# EAGLE board AcceLog_v00 (EAGLE 7.3.0)
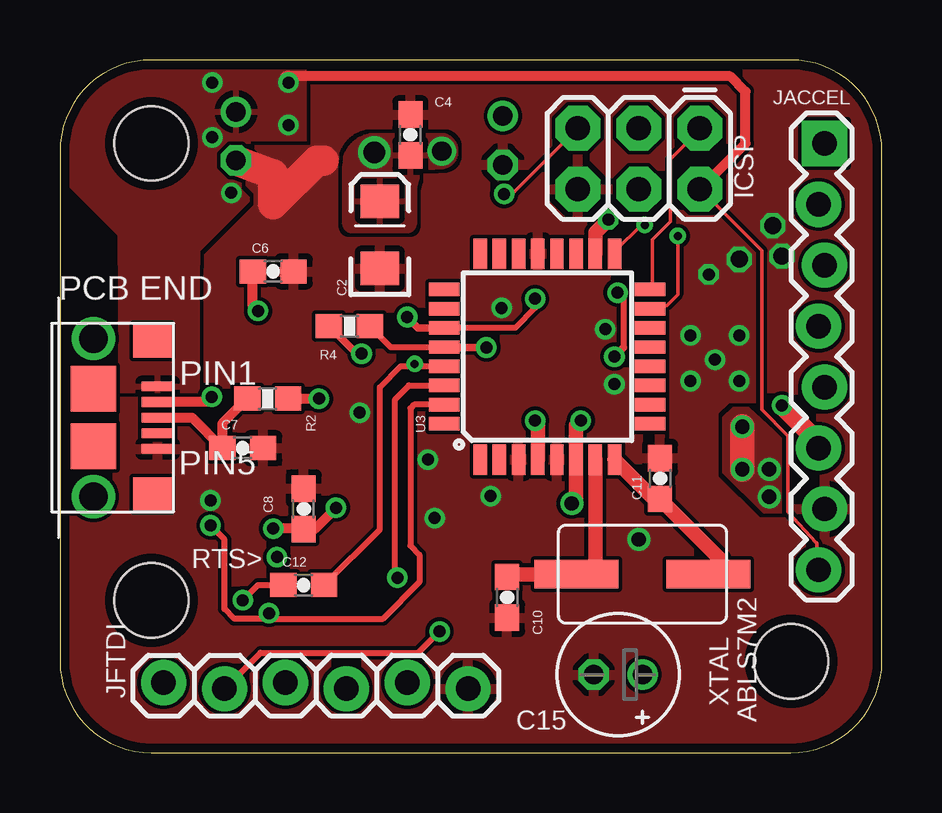
[diagram p0: board, top side]
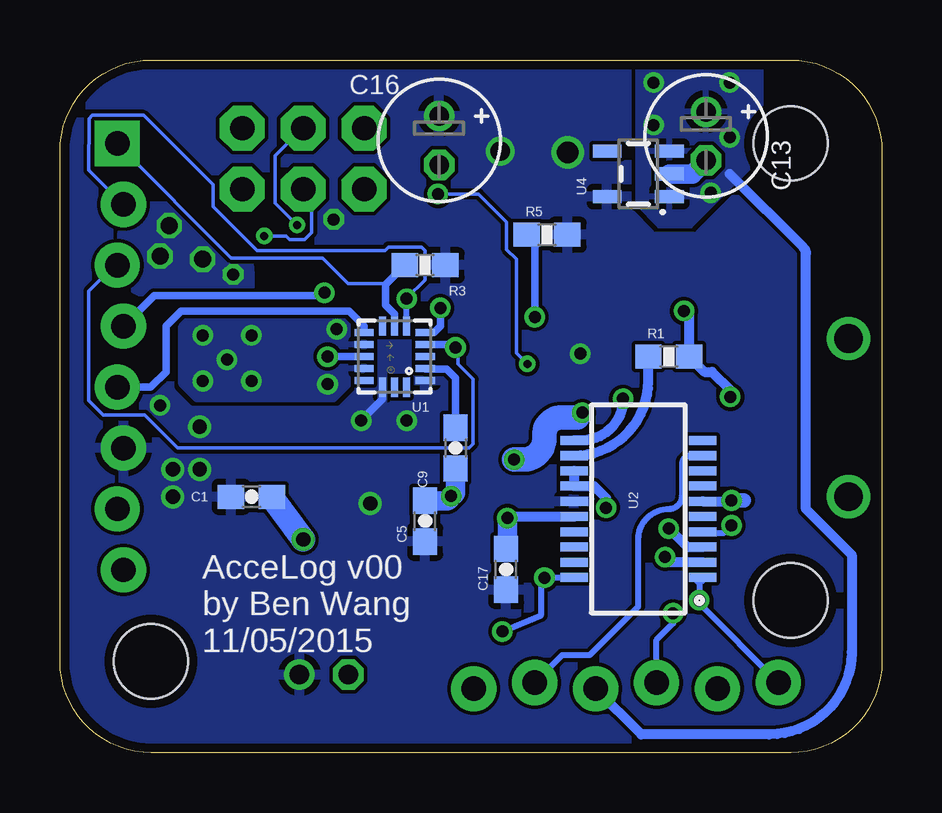
[diagram p1: board, bottom side, seen from below]

Size 34.27 x 28.88 mm. Coordinates in mm from the lower left corner, seen from the top.
Outline: 0,25.07 0,3.81 arc90 3.81,0 30.46,0 arc90 34.27,3.81 34.27,25.07 arc90 30.46,28.88 3.81,28.88 arc90 0,25.07
Copper layers (1*16): Top 0.0356mm / dielectric 1.5011mm / Bottom 0.0356mm
Design rules "LaenPCBOrder": minimum track width 6mil, minimum drill 13mil, track to track 6mil, track to pad 6mil, pad to pad 6mil, via to via 6mil, smd to smd 6mil, copper to edge 15mil, drill to drill 6mil, minimum pad ring 7mil, minimum via ring 7mil, stop-mask expansion 3mil, vias tented up to drill 0mil, thermal gap 10mil
Holes 3.1 mm at 30.48,3.81 3.81,25.4 3.81,6.35

## Footprints (pad centres in the part's own frame; a part is rotated, then mirrored left to right if it is on the bottom)
0603-CAP = smd 1.1 x 1: 1 -0.85,0; 2 0.85,0
EIA3216 = smd 1.4 x 1.6: A 1.4,0; C -1.4,0
E2-5 = drill 0.813 pad 1.27: + -1.016,0 | drill 0.813 pad 1.27 octagon: - 1.016,0
2X3 = drill 1.016 pad 1.88 octagon: 1 0,0; 2 0,2.54; 3 2.54,0; 4 2.54,2.54; 5 5.08,0; 6 5.08,2.54
1X08_LOCK = drill 1.016 pad 1.88 square: 1 0,0.127 | drill 1.016 pad 1.88: 2 2.54,-0.127; 3 5.08,0.127; 4 7.62,-0.127; 5 10.16,0.127; 6 12.7,-0.127; 7 15.24,0.127; 8 17.78,-0.127
1X06_LOCK = drill 1.016 pad 1.88: 1 0,0; 2 2.54,-0.254; 3 5.08,0; 4 7.62,-0.254; 5 10.16,0; 6 12.7,-0.254
10118193 = smd 0.4 x 1.35: D+ 0,2.675; D- -0.65,2.675; GND 1.3,2.675; ID 0.65,2.675; VBUS -1.3,2.675 | smd 1.4 x 1.6: P$6 -3.2,2.45; P$7 3.2,2.45 | smd 1.9 x 1.9: P$8 1.2,0; P$9 -1.2,0 | drill 1.2 pad 1.6: P$11 3.3,0; P$12 -3.3,0
0603-RES = smd 1.1 x 1: 1 -0.85,0; 2 0.85,0
QFN-16_0.5MM = smd 0.8 x 0.3: 1 -1.275,1; 2 -1.275,0.5; 3 -1.275,0; 4 -1.275,-0.5; 5 -1.275,-1; 9 1.275,-1; 10 1.275,-0.5; 11 1.275,0; 12 1.275,0.5; 13 1.275,1 | smd 0.3 x 0.8: 6 -0.5,-1.275; 7 0,-1.275; 8 0.5,-1.275; 14 0.5,1.275; 15 0,1.275; 16 -0.5,1.275
SSOP20_L = smd 0.381 x 1.143: 1 -2.857,-2.68; 2 -2.223,-2.68; 3 -1.587,-2.68; 4 -0.953,-2.68; 5 -0.318,-2.68; 6 0.318,-2.68; 7 0.953,-2.68; 8 1.587,-2.68; 9 2.223,-2.68; 10 2.857,-2.68; 11 2.857,2.68; 12 2.223,2.68; 13 1.587,2.68; 14 0.953,2.68; 15 0.318,2.68; 16 -0.318,2.68; 17 -0.953,2.68; 18 -1.587,2.68; 19 -2.223,2.68; 20 -2.857,2.68
TQFP32-08 = smd 1.27 x 0.559: 1 -4.293,2.8; 2 -4.293,2; 3 -4.293,1.2; 4 -4.293,0.4; 5 -4.293,-0.4; 6 -4.293,-1.2; 7 -4.293,-2; 8 -4.293,-2.8; 17 4.293,-2.8; 18 4.293,-2; 19 4.293,-1.2; 20 4.293,-0.4; 21 4.293,0.4; 22 4.293,1.2; 23 4.293,2; 24 4.293,2.8 | smd 0.559 x 1.27: 9 -2.8,-4.293; 10 -2,-4.293; 11 -1.2,-4.293; 12 -0.4,-4.293; 13 0.4,-4.293; 14 1.2,-4.293; 15 2,-4.293; 16 2.8,-4.293; 25 2.8,4.293; 26 2,4.293; 27 1.2,4.293; 28 0.4,4.293; 29 -0.4,4.293; 30 -1.2,4.293; 31 -2,4.293; 32 -2.8,4.293
SOT23-5 = smd 0.55 x 1.2: 1 -0.95,-1.3; 2 0,-1.3; 3 0.95,-1.3; 4 0.95,1.3; 5 -0.95,1.3
ABLS7M2 = smd 3.5 x 1.2: P$1 -2.75,0; P$2 2.75,0

## Placement (x,y rotation side)
C1  0.1uF  [0603-CAP]  26.29,10.67 0 bottom
C2  2.2uF  [EIA3216]  13.34,21.59 90 top
C4  0.1uF  [0603-CAP]  14.61,25.76 90 top
C5  4.7uF  [0603-CAP]  19.05,9.65 90 bottom
C6  47pF  [0603-CAP]  8.89,20.07 0 top
C7  47pF  [0603-CAP]  7.62,12.7 0 top
C8  100nF  [0603-CAP]  10.16,10.16 90 top
C9  0.1uF  [0603-CAP]  17.78,12.7 270 bottom
C10  18pF  [0603-CAP]  18.64,6.48 270 top
C11  18pF  [0603-CAP]  25.02,11.43 90 top
C12  0.1uF  [0603-CAP]  10.16,6.99 0 top
C13  [E2-5]  7.34,25.7 270 bottom
C15  [E2-5]  23.27,3.25 180 top
C16  [E2-5]  18.47,25.53 270 bottom
C17  0.1uF  [0603-CAP]  15.67,7.65 90 bottom
ICSP  [2X3]  26.67,26.04 180 top
JACCEL  [1X08_LOCK]  31.75,25.4 270 top
JFTDI  [1X06_LOCK]  4.32,2.92 0 top
JUSB  10118193  [10118193]  1.4,13.97 270 top
R1  27Ω  [0603-RES]  8.89,16.51 0 bottom
R2  27Ω  [0603-RES]  8.66,14.76 180 top
R3  27Ω  [0603-RES]  19.05,20.32 0 bottom
R4  10KΩ  [0603-RES]  12.06,17.78 180 top
R5  10KΩ  [0603-RES]  13.97,21.59 0 bottom
U1  MMA8452Q  [QFN-16_0.5MM]  20.32,16.51 180 bottom
U2  FTS31XS-U  [SSOP20_L]  10.16,10.16 90 bottom
U3  ATMEGA328P_TQFP  [TQFP32-08]  20.32,16.51 90 top
U4  3.3V/150mA  [SOT23-5]  10.16,24.13 90 bottom
XTAL  ABLS7M2  [ABLS7M2]  24.28,7.44 180 top

## Library data of the parts
C1 C4-C12 C17 R1-R5 = SparkFun-Passives
C2 = SparkFun-Capacitors
C13 C15 C16 = rcl
ICSP = SparkFun-Connectors; PROD_ID: CONN-09701
JACCEL JFTDI = SparkFun-Connectors
JUSB = MicroUSB; MPN: 10118193; OC_DIGIKEY: 609-4616-1-ND; WEBSITE: http://www.digikey.com/product-detail/en/10118193-0001LF/609-4616-1-ND/2785380
U1 = SparkFun-Sensors; PROD_ID: IC-10769
U2 = SparkFun-DigitalIC; PROD_ID: IC-11524
U3 = SparkFun-DigitalIC; PROD_ID: IC-09069
U4 = SparkFun-PowerIC; PROD_ID: VREG-00822
XTAL = AcceLogLib; DIGIKEY: 535-12830-1-ND; WEBSITE: http://www.digikey.com/product-detail/en/ABLS7M2-16.000MHZ-D-2Y-T/535-12830-1-ND/5135076

## Nets
+3V3: C1.1 C2.A C4.1 C5.1 C15.+ C16.+ C17.1 JACCEL.6 R3.2 R4.2 R5.2 U1.1 U1.14 U2.15 U3.4 U3.6 U3.18 U4.5
+5V: C13.+ ICSP.2 JACCEL.8 JFTDI.4 JUSB.VBUS U4.1 U4.3
CTS: JFTDI.5 U2.9
D+: C7.1 JUSB.D+ R2.2
D-: C6.1 JUSB.D- R1.2
DTR: C12.1 JFTDI.1 U2.1
FTDI3V3: C8.1 U2.3 U2.13 U2.14
GND: C1.2 C2.C C4.2 C5.2 C6.2 C7.2 C8.2 C9.2 C10.2 C11.2 C13.- C15.- C16.- C17.2 ICSP.6 JACCEL.7 JFTDI.6 JUSB.GND U1.5 U1.10 U1.12 U2.6 U2.16 U3.3 U3.5 U3.21 U4.2
INT1: JACCEL.4 U1.11
INT2: JACCEL.5 U1.9
MISO: ICSP.1 U3.16
MOSI: ICSP.4 U3.15
N$10: C10.1 U3.7 XTAL.P$2
N$11: C9.1 U1.2
N$12: C11.1 U3.8 XTAL.P$1
RESET: C12.2 ICSP.5 U3.29
RTS: U2.2
RXD: JFTDI.3 U2.4 U3.31
SA0: JACCEL.1 R3.1 U1.7
SCK: ICSP.3 U3.17
SCL: JACCEL.3 R4.1 U1.4 U3.28
SDA: JACCEL.2 R5.1 U1.6 U3.27
TXD: JFTDI.2 U2.20 U3.30
USBDM: R1.1 U2.12
USBDP: R2.1 U2.11

## Tracks (layer width: path | path; a pad name or v marks a point on that pad's centre or on a via)
+3V3  (via drill 0.5, 0.6, 0.8, 0.9)
  Top 0.305: R4.2 12.36,16.64 v12.57,16.64
  Top 0.61: U3.4 19.92,13.61 v19.81,13.84 | U3.6 21.52,13.65 v21.72,13.84 | v22.86,22.23 22.32,21.68 U3.18 | v21.34,10.39 21.51,10.57 21.51,12.6
  Top 0.813: 31.5,12.7 31.5,13.08 v30.1,14.48
  Top 1.016: 31.5,12.7 31.75,12.7 | v28.45,13.59 v28.45,11.81
  Bottom 0.305: U1.14 20.82,14.74 v21.72,13.84
  other vias: 13.11,25.02 15.91,25.08 29.57,10.67 29.57,11.81
  pour Bottom (rank 5): 0,30.48 36.83,30.48 36.83,-5.08 0,-5.08
  pour Top: 27.69,13.97 28.07,14.35 28.7,14.35 30.23,12.95 30.23,10.16 30.1,10.03 29.34,10.03 27.69,11.68
  pour Top: 11.89,23.11 11.89,24.46 arc-90 13.16,25.73 15.85,25.73 arc-90 16.48,25.1 16.48,25.07 arc-90 15.85,24.43 15.7,24.43 arc90 14.76,23.5 14.76,22.15 14.76,22.09 arc-90 14.44,21.77 13.06,21.77 12.2,21.77 arc-90 11.89,22.09
+5V  (via drill 0.5)
  Top 0.152: JACCEL.8 31.55,7.67 31.55,8.74 31.52,8.74 30.35,10.03 30.35,13.21 29.26,14.3 29.26,20.93 26.82,23.37 ICSP.2
  Top 0.406: ICSP.2 28.57,25.4 28.57,27.56 27.94,28.19 9.4,28.19
  Bottom 0.406: JFTDI.4 10.03,0.76 4.7,0.76 arc-90 1.27,4.19 1.27,8.26 3.17,10.16 3.17,20.82 arc-45 3.27,21.05 6.35,24.13
  other vias: 6.35,25.65 9.53,26.16 9.53,27.94 6.35,27.94 7.14,23.34
  pour Bottom (rank 3): 5.08,25.4 4.57,25.4 8,21.97 9.27,21.97 10.16,22.86 10.16,31.75 5.08,31.75
  pour Top (rank 3): 2.54,15.11 5.71,15.11 5.71,21.16 2.54,21.16
  pour Top (rank 2): 2.54,20.32 2.54,21.92 5.08,24.46 5.08,29.21 6.35,29.21 10.16,29.21 10.16,25.4 5.71,20.95 5.71,20.68 5.71,20.32
  pour Top (rank 3): 2.54,21.59 -1.27,25.4 -1.27,26.67 1.27,29.21 5.08,29.21 6.35,27.94 6.35,24.13 3.81,21.59
CTS
  Bottom 0.254: JFTDI.5 13.34,4.06 12.19,4.06 10.16,6.1 10.16,8.89 arc90 8.89,10.16 arc-90 8.33,10.72 8.33,12.04 arc90 7.99,12.38 U2.9 | 7.66,12.38 U2.9 | 7.81,12.38 U2.9
D+
  Top 0.406: JUSB.D+ 5.5,13.97 C7.1 6.77,13.72 R2.2
D-  (via drill 0.5)
  Top 0.406: v8.26,18.41 8.04,18.63 C6.1 | v6.33,14.83 6.11,14.62 JUSB.D-
  Bottom 0.406: v8.26,18.41 8.04,18.2 R1.2 7.41,15.88 7.09,15.88 6.33,15.11 v6.33,14.83
DTR  (via drill 0.5)
  Top 0.254: v7.62,6.35 8.26,6.99 C12.1
  Bottom 0.254: 7.62,7.16 v7.62,6.35 | 7.62,6.22 JFTDI.1
  Bottom 0.406: U2.1 7.62,7.16 | v7.62,6.35 7.62,6.22
FTDI3V3  (via drill 0.5)
  Top 0.406: v11.51,10.21 10.61,9.31 C8.1 | 10.15,9.3 10.1,9.35 v8.89,9.35
  Top 0.813: 10.2,9.27 arc-90 C8.1 arc-90 10.15,9.3
  Bottom 0.406: U2.13 U2.14 12,11.11 11.51,10.62 v11.51,10.21 | v8.89,9.35 8.12,8.57 U2.3
GND  (via drill 0.5, 0.6, 0.7)
  Top 0.813: 11,24.69 11,24.77
  Top 1.27: 11,24.69 10.72,24.69 8.89,22.86 8.89,24.1 U4.2 C13.-
  Bottom 0.305: v18.41,18.54 18.41,17.78 18.68,17.51 U1.5
  Bottom 0.406: v15.62,9.78 15.56,9.84 U2.16 | U2.6 6.31,10.48 v6.27,10.52
  Bottom 0.61: 5.75,10.52 v6.27,10.52
  Bottom 0.813: C13.- 7.9,24.13 U4.2 | C17.2 15.62,8.55 v15.62,9.78 | C9.2 17.78,10.92 arc90 v17.96,10.69 arc90 18.2,10.5 C5.2
  Bottom 1.016: v24.13,8.89 C1.2 | 12.7,13.97 13.39,13.97 arc-90 14.07,13.28 14.07,13.11 arc90 14.96,12.22 v15.34,12.22
  other vias: 27.3,16.38 28.32,17.4 26.29,15.49 26.29,17.4 27.05,19.94 28.32,20.57 29.72,21.97 30.1,20.7 28.32,15.49 23.11,15.37 22.73,17.65 12.5,14.17
  pour Top (rank 5): -1.27,31.75 35.56,31.75 35.56,-2.54 -1.27,-2.54
  pour Bottom: 22.86,18.41 21.59,17.14 21.59,16 22.86,14.73 28.57,14.73 29.21,15.37 29.21,17.78 28.57,18.41
  pour Bottom: 26.67,19.05 30.48,19.05 arc90 31.75,20.32 31.75,21.59 arc90 30.48,22.86 29.21,22.86 arc90 26.29,19.94 26.29,19.43 arc90
  pour Top: 7.67,25.22 11.43,25.22 8.46,22.25 8.46,23.09 7.8,23.75 8.2,24.16 8.2,24.99
INT1  (via drill 0.5)
  Top 0.254: v23.24,19.18 23.5,18.92 23.5,16.89
  Top 0.305: 23.5,16.89 v23.11,16.51
  Bottom 0.305: U1.11 v23.11,16.51 | JACCEL.4 30.35,19.05 23.24,19.05 v23.24,19.18
INT2
  Bottom 0.305: U1.9 21.59,17.79 22.23,18.41 29.21,18.41 29.84,17.78 29.84,15.88 30.48,15.24 JACCEL.5
MISO
  Top 0.152: U3.16 24.69,19.41 24.69,21.39 25.45,22.15 25.45,24.74 26.67,25.96 ICSP.1
MOSI  (via drill 0.33)
  Top 0.152: v25.76,21.54 25.76,19.1 25.3,18.64 24.69,18.64 U3.15
  Bottom 0.152: v25.76,21.54 24.84,21.54 24.69,21.39 24.08,21.39 23.77,21.69 23.77,23.06 24.08,23.37 ICSP.4
N$10
  Top 0.61: U3.7 22.32,7.72 XTAL.P$2 18.76,7.44 C10.1
N$11
  Bottom 0.305: U1.2 19.04,16 18.16,16 17.78,15.62 C9.1
N$12
  Top 0.152: 23.16,12.09 U3.8
  Top 0.61: U3.8 24.76,10.58 C11.1 27.54,8.06 XTAL.P$1
RESET  (via drill 0.33, 0.5)
  Top 0.152: v14.78,16.2 14.78,16.11 | v18.52,23.29 18.85,23.29 ICSP.5
  Top 0.254: C12.2 13.34,9.31 13.34,15.24 14.21,16.11 14.78,16.11 U3.29
  Bottom 0.152: v14.78,16.2 15.24,16.66 15.24,20.57 15.65,20.98 15.65,22.12 16.82,23.29 v18.52,23.29
RTS  (via drill 0.5)
  Bottom 0.406: U2.2 8.83,7.94 v9.04,8.15
RXD  (via drill 0.5)
  Top 0.254: U3.31 14.76,14.51 14.61,14.35 14.61,8.64 14.99,8.26 14.99,7.11 13.46,5.59 8.94,5.59 v8.71,5.82 8.48,5.59 7.26,5.59 6.86,5.99 6.86,8.89 v6.27,9.47
  Bottom 0.254: JFTDI.3 9.4,4.7 8.71,5.38 v8.71,5.82 | U2.4 7.44,9.17 6.58,9.17 v6.27,9.47
SA0
  Bottom 0.152: 20.69,19.53 20.73,19.56 22.25,19.56 23.32,20.62 27.13,20.62 31.85,25.35 JACCEL.1
  Bottom 0.305: U1.7 20.32,18.29 20.7,18.67 20.7,19.52 20.69,19.53 R3.1
SCK  (via drill 0.33)
  Top 0.152: v24.38,22 24.23,22 23.16,20.93 U3.17
  Bottom 0.152: v24.38,22 25.3,22.91 25.3,24.89 24.23,25.96 ICSP.3
SCL  (via drill 0.5)
  Top 0.254: R4.1 13.79,16.91 U3.28
  Top 0.305: v17.78,16.89 16.05,16.89 U3.28
  Bottom 0.152: v17.78,16.89 17.68,16.82 17.68,16.2 17.04,15.57 17.04,12.88 17.22,12.7 29.36,12.7 30.73,14.07 32.46,14.07 33.07,14.68 33.07,19.25 32,20.32 JACCEL.3
  Bottom 0.305: U1.4 17.9,17.01 v17.78,16.89
SDA  (via drill 0.5)
  Top 0.254: v19.81,18.92 19.81,18.54 18.98,17.71 U3.27
  Top 0.305: v14.48,18.16 14.93,17.71 U3.27
  Bottom 0.152: JACCEL.2 31.7,22.91 33.07,24.28 33.05,26.44 32.92,26.57 30.79,26.57 27.89,23.67 27.89,22.76 26.06,20.93 20.73,20.93 20.57,21.08 19.2,21.08 19.05,20.93 19.05,19.71 19.81,18.95 v19.81,18.92
  Bottom 0.254: U1.6 19.82,18.79 v19.81,18.92
  Bottom 0.305: R5.1 arc90 14.48,21.25 v14.48,18.16
TXD  (via drill 0.5)
  Top 0.254: U3.30 14.55,15.31 13.97,14.73 13.97,7.39 v14.07,7.29 | JFTDI.2 8.36,4.17 14.94,4.17 v15.82,5.05 15.67,4.9
  Bottom 0.254: v15.82,5.05 14.22,5.71 14.22,7.14 v14.07,7.29 12.85,7.29 U2.20
USBDM
  Bottom 0.406: U2.12 arc-90 9.74,15.48 R1.1
USBDP  (via drill 0.5)
  Top 0.406: R2.1 v10.79,14.76
  Bottom 0.406: v10.79,14.76 arc90 12.54,13.02 U2.11

## Text on the board
tNames: RTS>
bNames: AcceLog v00 / by Ben Wang / 11/05/2015